# EAGLE board TPS92638 - Breakout (EAGLE 7.7.0)
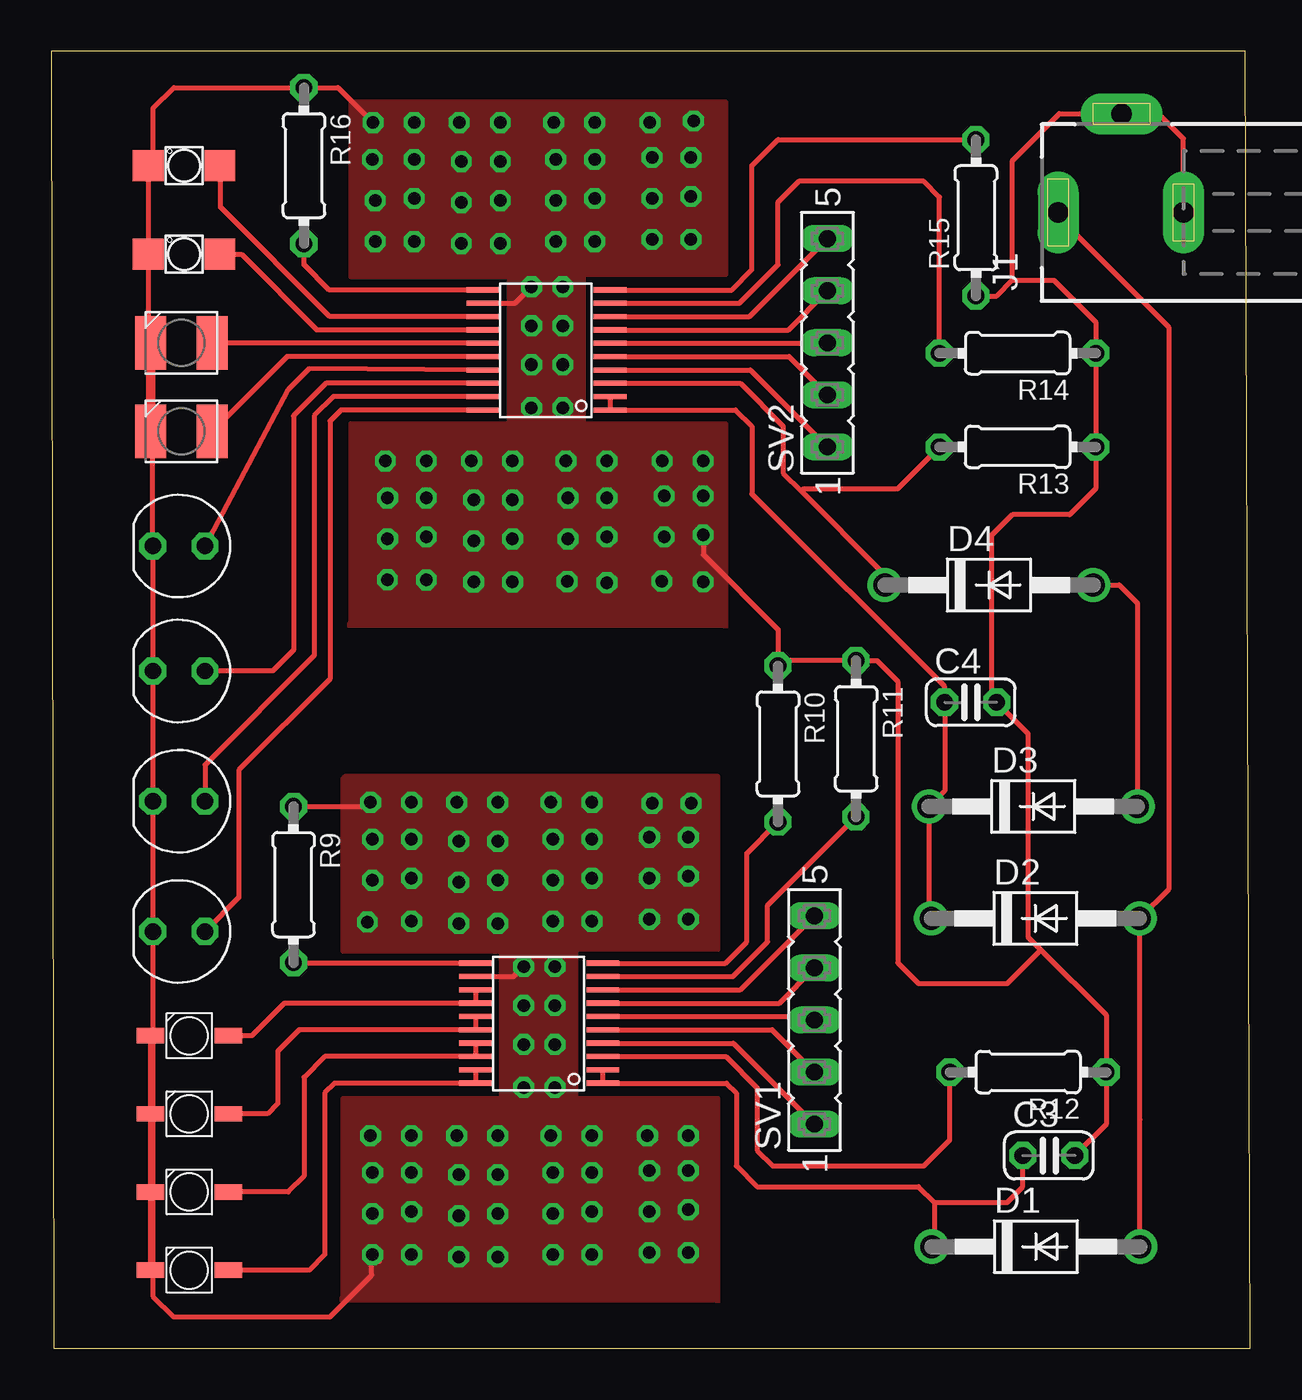
[diagram p0: board, top side]
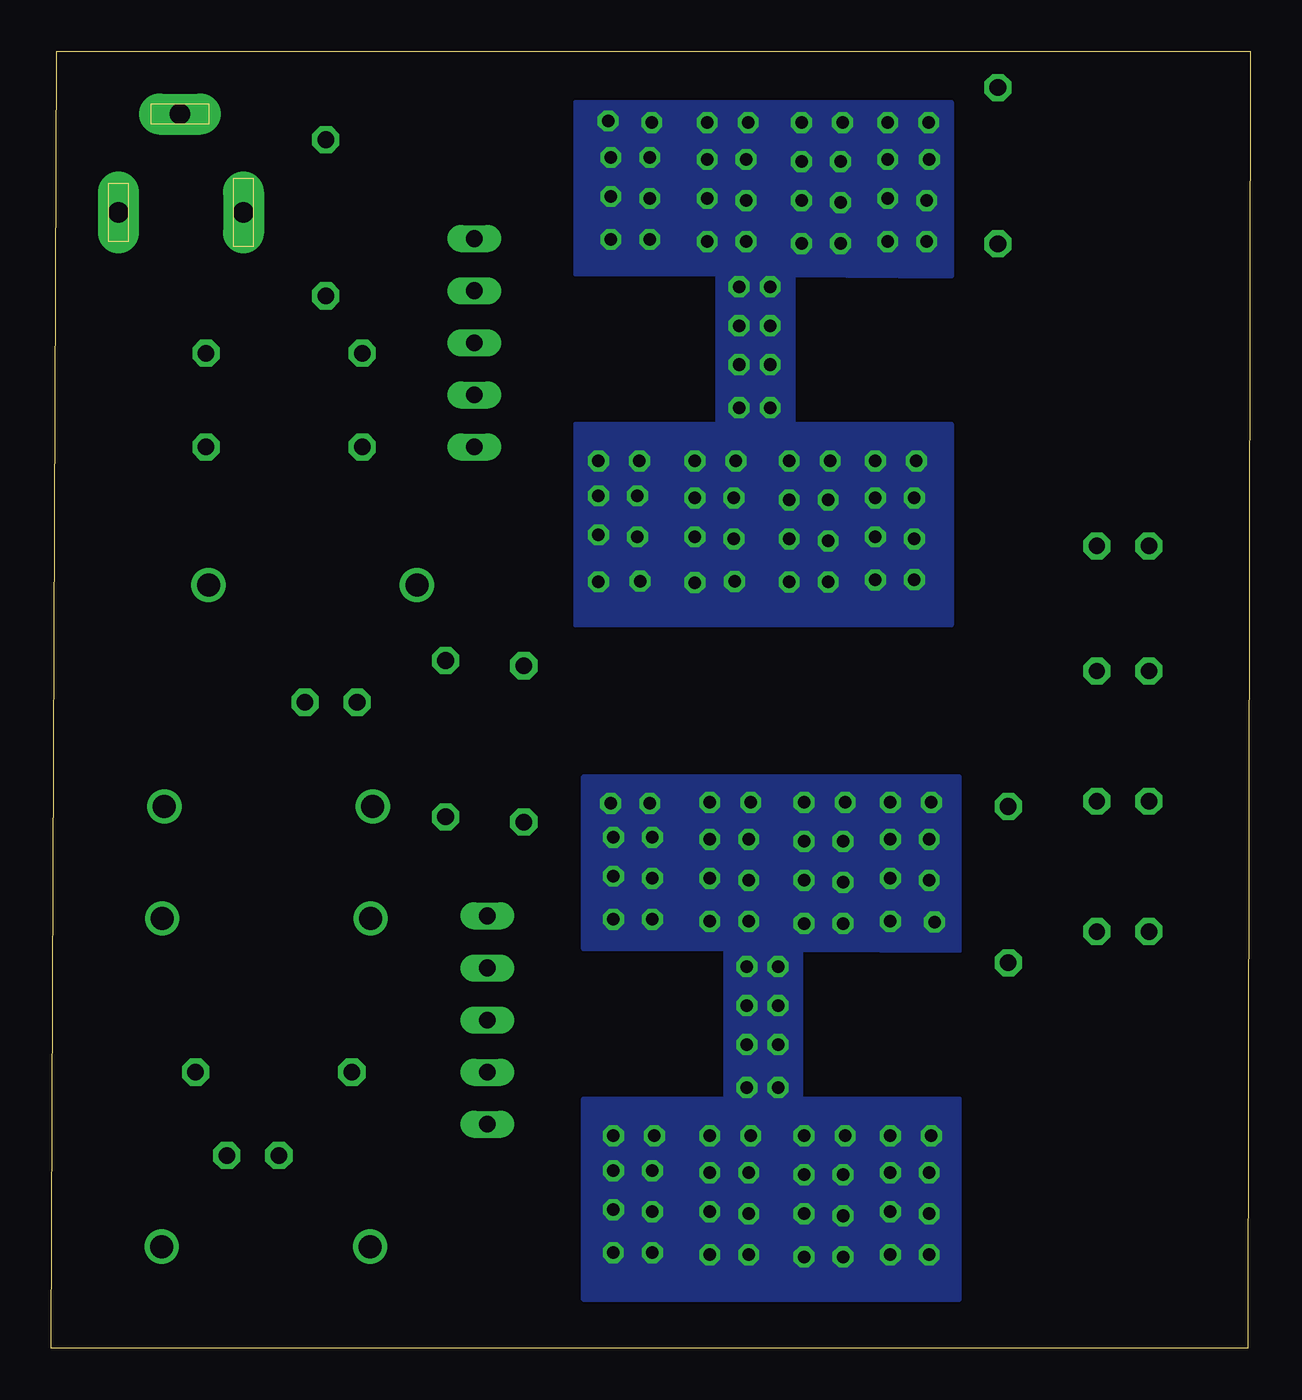
[diagram p1: board, bottom side, seen from below]

Size 58.47 x 63.24 mm. Coordinates in mm from the lower left corner, seen from the top.
Outline: 0.13,0 58.47,0 58.22,63.24 0,63.24 0.13,0
Copper layers (1*16): Top 0.035mm / dielectric 1.5mm / Bottom 0.035mm
Design rules "default": minimum track width 10mil, minimum drill 24mil, track to track 8mil, track to pad 8mil, pad to pad 8mil, via to via 8mil, smd to smd 8mil, copper to edge 40mil, drill to drill 8mil, minimum pad ring 10mil, minimum via ring 8mil, stop-mask expansion 4mil, vias tented up to drill 0mil, thermal gap 10mil

## Footprints (pad centres in the part's own frame; a part is rotated, then mirrored left to right if it is on the bottom)
GULLWING-2.3MM = smd 1.35 x 0.75: P$1 -1.9,0; P$2 1.9,0
C025-024X044 = drill 0.813 octagon: 1 -1.27,0; 2 1.27,0
DO41-10 = drill 1.118: A 5.08,0; C -5.08,0
DCJ0202 = drill 1 pad 2 long: 1 0,3.1; 2 4.8,0; 3 0,-3
0204/7 = drill 0.813 octagon: 1 -3.81,0; 2 3.81,0
FE05-1 = drill 0.813 long: 1 -5.08,0; 2 -2.54,0; 3 0,0; 4 2.54,0; 5 5.08,0
TPS92638 = smd 0.25 x 1.6: EN -2.25,-3.1; GND 2.3,3.1; IOUT1 -2.9,3.1; IOUT2 -2.25,3.1; IOUT3 -1.6,3.1; IOUT4 -0.95,3.1; IOUT5 -0.3,3.1; IOUT6 0.35,3.1; IOUT7 1,3.1; IOUT8 1.65,3.1; PWM1 -0.95,-3.1; PWM2 -0.3,-3.1; PWM3 0.35,-3.1; PWM4 1,-3.1; REF 2.95,3.1; REFHI 2.95,-3.1; STOP -1.6,-3.1; SUPPLY -2.9,-3.1; TEMP 2.3,-3.1; ~FAULT 1.65,-3.1
1316 = drill 0.8 octagon: ANODE -1.27,0; CATHODE 1.27,0
L424 = drill 0.8 octagon: ANODE -1.27,0; CATHODE 1.27,0
LHT674 = smd 1.5 x 2.6: ANODE -1.5,0; CATHODE 1.5,0
OSI-330_SERIES = smd 1.5 x 1.5: ANODE -1.75,0; CATHODE 1.75,0

## Placement (x,y rotation side)
940NM1  VSMB2020  [GULLWING-2.3MM]  6.73,3.81 180 top
940NM2  VSMB2020  [GULLWING-2.3MM]  6.73,7.62 180 top
940NM3  VSMB2020  [GULLWING-2.3MM]  6.73,11.43 180 top
940NM4  VSMB2020  [GULLWING-2.3MM]  6.73,15.24 180 top
C3  0.1uF  [C025-024X044]  48.64,9.4 0 top
C4  0.1uF  [C025-024X044]  44.83,31.5 0 top
D1  1N4004  [DO41-10]  48.01,4.95 0 top
D2  1N4004  [DO41-10]  47.98,20.96 0 top
D3  1N4004  [DO41-10]  47.88,26.42 0 top
D4  1N4004  [DO41-10]  45.72,37.21 0 top
J1  DCJ0202  [DCJ0202]  52.2,55.37 90 top
R9  16k  [0204/7]  11.81,22.61 270 top
R10  7k  [0204/7]  35.43,29.46 270 top
R11  10k  [0204/7]  39.24,29.72 270 top
R12  10k  [0204/7]  47.62,13.46 180 top
R13  10k  [0204/7]  47.12,43.94 180 top
R14  10k  [0204/7]  47.12,48.51 180 top
R15  10k  [0204/7]  45.09,55.12 90 top
R16  49k  [0204/7]  12.32,57.66 270 top
SV1  [FE05-1]  37.21,16 90 top
SV2  [FE05-1]  37.85,49.02 90 top
U$1  TPS92638  [TPS92638]  23.79,15.82 90 top
U$2  TPS92638  [TPS92638]  24.14,48.65 90 top
U$3  1316  [1316]  6.22,20.32 180 top
U$4  1316  [1316]  6.22,26.67 180 top
U$5  L424  [L424]  6.22,33.02 180 top
U$6  L424  [L424]  6.22,39.12 180 top
U$7  LHT674  [LHT674]  6.35,44.7 180 top
U$8  LHT674  [LHT674]  6.35,49.02 180 top
U$9  OSI-330_SERIES  [OSI-330_SERIES]  6.48,53.34 180 top
U$10  OSI-330_SERIES  [OSI-330_SERIES]  6.48,57.66 180 top

## Library data of the parts
940NM1-940NM4 = VS
C3 C4 R9-R16 = rcl
D1-D4 = diode
J1 = con-jack; OC_FARNELL: unknown; OC_NEWARK: unknown
SV1 SV2 = con-lsta; OC_FARNELL: unknown; OC_NEWARK: unknown
U$1 U$2 = TPS92638-Q1
U$3 U$4 = 1316
U$5 U$6 = L424
U$7 U$8 = LHT674
U$9 U$10 = OSI-330_series

## Nets
+12V: D1.A D2.A J1.1
GND: 940NM1.P$2 940NM2.P$2 940NM3.P$2 940NM4.P$2 C3.2 C4.2 J1.2 J1.3 R9.1 R10.1 R11.1 R12.1 R13.1 R14.1 R15.1 R16.1 U$1.GND U$2.GND U$3.CATHODE U$4.CATHODE U$5.CATHODE U$6.CATHODE U$7.CATHODE U$8.CATHODE U$9.CATHODE U$10.CATHODE
N$1: SV1.1 U$1.PWM1
N$2: SV1.2 U$1.PWM2
N$3: SV1.3 U$1.PWM3
N$4: SV1.4 U$1.PWM4
N$5: R12.2 U$1.STOP
N$6: SV2.1 U$2.PWM1
N$7: SV2.2 U$2.PWM2
N$8: SV2.3 U$2.PWM3
N$9: SV2.4 U$2.PWM4
N$10: D4.C R13.2 U$2.STOP
N$11: R10.2 U$1.REFHI
N$12: R11.2 U$1.TEMP
N$13: R9.2 U$1.REF
N$14: R14.2 U$2.TEMP
N$15: R15.2 U$2.REFHI
N$16: R16.2 U$2.REF
N$17: C3.1 D1.C U$1.EN U$1.SUPPLY
N$18: C4.1 D2.C D3.C U$2.EN U$2.SUPPLY
N$19: 940NM1.P$1 U$1.IOUT1 U$1.IOUT2
N$20: 940NM2.P$1 U$1.IOUT3 U$1.IOUT4
N$21: U$2.IOUT1 U$3.ANODE
N$22: 940NM3.P$1 U$1.IOUT5 U$1.IOUT6
N$23: 940NM4.P$1 U$1.IOUT7 U$1.IOUT8
N$24: U$2.IOUT2 U$4.ANODE
N$25: U$2.IOUT3 U$5.ANODE
N$26: U$2.IOUT4 U$6.ANODE
N$27: U$2.IOUT5 U$7.ANODE
N$28: U$2.IOUT6 U$8.ANODE
N$29: U$2.IOUT7 U$9.ANODE
N$30: U$2.IOUT8 U$10.ANODE
N$32: SV1.5 U$1.~FAULT
N$33: SV2.5 U$2.~FAULT
N$34: D3.A D4.A

## Tracks (layer width: path | path; a pad name or v marks a point on that pad's centre or on a via)
+12V
  Top 0.254: 53.06,11.18 D2.A 54.48,22.38 54.48,49.78 49.1,55.17 J1.1 | 53.06,11.18 53.06,10.14 | D1.A 53.09,11.15 53.06,11.18
GND  (via drill 0.61 pad 0.25)
  Top 0.254: 4.95,48.26 4.95,44.81 | 4.95,44.81 U$7.CATHODE 4.73,44.83 U$9.CATHODE U$10.CATHODE 4.95,57.88 4.95,60.45 5.97,61.47 R16.1 13.98,61.47 v15.69,59.76 | U$4.CATHODE U$5.CATHODE U$6.CATHODE 4.95,44.81 | 4.95,3.93 940NM1.P$2 940NM2.P$2 940NM3.P$2 940NM4.P$2 | U$4.CATHODE U$3.CATHODE 4.95,15.36 | 16,4.22 v15.66,4.56 15.62,4.51 15.62,3.56 13.59,1.52 5.97,1.52 4.95,2.54 U$4.CATHODE | U$2.GND 22.61,50.95 v23.41,51.76 | U$1.GND 22.55,18.12 v23.03,18.61 | R9.1 15.37,26.42 v15.56,26.61 | v31.79,39.66 31.79,38.69 35.43,35.05 R10.1 35.69,33.53 R11.1 40.26,33.53 41.28,32.51 41.28,18.8 42.29,17.78 46.61,17.78 48.26,19.43 | 48.26,19.43 51.44,16.26 R12.1 51.44,10.92 C3.2 | 48.26,19.43 47.62,20.07 47.62,29.97 C4.2 45.85,31.75 45.85,39.62 46.86,40.64 49.66,40.64 50.93,41.91 R13.1 R14.1 50.93,50.04 48.9,52.07 46.86,52.07 | J1.3 55.2,58.98 53.98,60.2 52.22,60.2 J1.2 52.17,60.2 49.15,60.2 46.86,57.91 46.86,52.07 | R15.1 46.1,51.31 46.86,52.07
  Top 0.381: 4.73,48.49 4.95,48.26 4.95,48.92 U$8.CATHODE | 4.95,15.36 940NM4.P$2 | 15.51,59.94 v15.69,59.76 | U$7.CATHODE 4.85,44.6 4.44,44.2 4.44,44.3 U$7.CATHODE
  other vias: 19.89,59.76 21.89,59.76 24.49,59.76 26.49,59.76 17.69,59.76 29.19,59.76 17.69,57.96 19.99,57.86 21.89,57.86 24.59,57.96 26.49,57.96 29.29,58.06 31.19,58.06 15.79,55.96 17.69,56.06 19.99,55.86 21.89,55.96 24.59,55.96 26.49,56.06 29.29,56.06 31.19,56.16 15.79,53.96 17.69,53.96 19.99,53.86 21.89,53.86 24.59,53.96 26.49,53.96 29.29,54.06 31.19,54.06 18.29,43.26 16.29,43.26 20.49,43.26 22.49,43.26 25.09,43.26 27.09,43.26 29.79,43.26 31.79,43.26 31.79,41.56 29.89,41.56 27.09,41.46 25.19,41.46 22.49,41.36 20.59,41.36 18.29,41.46 16.39,41.46 16.39,39.46 18.29,39.56 20.59,39.36 22.49,39.46 25.19,39.46 27.09,39.56 29.89,39.56 16.39,37.47 18.29,37.46 20.59,37.36 22.49,37.36 25.15,37.38 27.09,37.33 23.41,49.86 23.41,47.96 23.41,45.86 24.94,51.76 24.94,49.86 24.94,47.96 24.94,45.86 24.56,18.61 24.56,16.71 24.56,14.81 24.56,12.71 23.03,16.71 23.03,14.81 23.03,12.71 19.76,26.61 21.76,26.61 24.36,26.61 26.36,26.61 17.56,26.61 15.66,24.81 17.56,24.81 19.86,24.71 21.76,24.71 24.46,24.81 26.36,24.81 29.16,24.91 31.06,24.91 15.66,22.81 17.56,22.91 19.86,22.71 21.76,22.81 24.46,22.81 26.36,22.91 29.16,22.91 31.06,23.01 17.56,20.81 19.86,20.71 21.76,20.71 24.46,20.81 26.36,20.81 29.16,20.91 31.06,20.91 15.56,10.36 19.76,10.36 21.76,10.36 24.36,10.36 26.36,10.36 17.56,10.36 29.06,10.36 31.06,10.36 15.66,8.56 17.56,8.56 19.86,8.46 21.76,8.46 24.46,8.56 26.36,8.56 29.16,8.66 31.06,8.66 15.66,6.56 17.56,6.66 19.86,6.46 21.76,6.56 24.46,6.56 26.36,6.66 29.16,6.66 31.06,6.76 17.56,4.56 19.86,4.46 21.76,4.46 24.46,4.56 26.36,4.56 29.16,4.66 15.66,57.96 29.29,26.56 31.2,26.56 15.41,20.78 31.07,4.66 31.32,59.84 29.76,37.4 31.79,37.37
  pour Top: 22.32,52.26 22.32,45.06 14.59,45.06 14.59,35.36 14.49,35.26 32.79,35.26 32.89,35.16 32.89,45.06 25.96,45.06 25.96,52.36 32.89,52.36 32.89,60.76 14.69,60.76 14.59,60.66 14.59,52.26
  pour Bottom: 22.32,52.31 22.32,45.06 14.59,45.06 14.59,35.26 32.89,35.26 32.89,45.06 25.96,45.06 25.96,52.36 32.89,52.36 32.89,60.76 14.59,60.76 14.59,52.26
  pour Top: 21.94,19.37 21.94,12.17 14.21,12.17 14.21,2.47 14.11,2.37 32.41,2.37 32.51,2.27 32.51,12.17 25.58,12.17 25.58,19.47 32.51,19.47 32.51,27.87 14.31,27.87 14.21,27.77 14.21,19.37
  pour Bottom: 21.94,19.42 21.94,12.17 14.21,12.17 14.21,2.37 32.51,2.37 32.51,12.17 25.58,12.17 25.58,19.47 32.51,19.47 32.51,27.87 14.21,27.87 14.21,19.37
N$1
  Top 0.254: U$1.PWM1 33.26,14.87 SV1.1
N$2
  Top 0.254: U$1.PWM2 35.15,15.52 SV1.2
N$3
  Top 0.254: U$1.PWM3 37.04,16.17 SV1.3
N$4
  Top 0.254: U$1.PWM4 35.49,16.82 SV1.4
N$5
  Top 0.254: U$1.STOP 32.89,14.22 34.42,12.7 34.42,9.65 35.18,8.89 42.55,8.89 43.82,10.16 R12.2
N$6
  Top 0.254: U$2.PWM1 34.09,47.7 SV2.1
N$7
  Top 0.254: U$2.PWM2 35.98,48.35 SV2.2
N$8
  Top 0.254: U$2.PWM3 37.82,49 SV2.3
N$9
  Top 0.254: U$2.PWM4 35.93,49.65 SV2.4
N$10
  Top 0.254: U$2.STOP 33.6,47.05 35.69,44.96 35.69,42.67 36.58,41.78 | 36.58,41.78 40.51,37.85 40.51,37.34 D4.C | 36.58,41.78 36.7,41.91 41.28,41.91 R13.2
N$11
  Top 0.254: U$1.REFHI 32.87,18.77 33.91,19.81 33.91,24.13 R10.2
N$12
  Top 0.254: U$1.TEMP 33.24,18.12 34.93,19.81 34.93,21.59 R11.2
N$13
  Top 0.254: U$1.REF 11.83,18.77 R9.2
N$14
  Top 0.254: U$2.TEMP 33.55,50.95 35.43,52.83 35.43,55.88 36.45,56.9 42.55,56.9 43.31,56.13 R14.2
N$15
  Top 0.254: U$2.REFHI 33.18,51.6 34.16,52.58 34.16,57.66 35.43,58.93 R15.2
N$16
  Top 0.254: U$2.REF 13.55,51.6 12.32,52.83 R16.2
N$17
  Top 0.254: U$1.EN U$1.SUPPLY 32.92,12.92 33.4,12.45 33.4,8.89 34.42,7.87 42.29,7.87 43.05,7.11 | 43.05,7.11 43.05,5.08 D1.C | 43.05,7.11 46.61,7.11 47.37,7.87 C3.1
N$18
  Top 0.254: U$2.EN U$2.SUPPLY 33.37,45.75 34.16,44.96 34.16,41.66 43.56,32.26 C4.1 43.56,27.18 D3.C 42.8,21.06 D2.C
N$19
  Top 0.254: U$1.IOUT2 U$1.IOUT1 13.81,12.92 13.34,12.45 13.34,4.57 12.57,3.81 940NM1.P$1 8.51,3.93
N$20
  Top 0.254: 8.51,7.74 940NM2.P$1 11.56,7.62 12.32,8.38 12.32,13.21 13.34,14.22 U$1.IOUT3 U$1.IOUT4
N$21
  Top 0.254: U$2.IOUT1 14.13,45.75 13.59,45.21 13.59,32.64 9.14,28.19 9.14,21.97 U$3.ANODE
N$22
  Top 0.254: 8.76,11.56 940NM3.P$1 10.54,11.43 11.05,11.94 11.05,14.48 12.1,15.52 U$1.IOUT5 U$1.IOUT6 20.64,16.13
N$23
  Top 0.254: 8.88,14.99 940NM4.P$1 9.78,15.24 11.36,16.82 U$1.IOUT7 U$1.IOUT8
N$24
  Top 0.254: U$2.IOUT2 13.76,46.4 12.83,45.47 12.83,33.78 7.49,28.45 U$4.ANODE
N$25
  Top 0.254: U$2.IOUT3 13.39,47.05 11.81,45.47 11.81,34.04 10.79,33.02 U$5.ANODE
N$26
  Top 0.254: U$2.IOUT4 12.57,47.75 11.56,46.74 U$6.ANODE
N$27
  Top 0.254: U$2.IOUT5 11.5,48.35 U$7.ANODE
N$28
  Top 0.254: U$2.IOUT6 7.87,49 U$8.ANODE
N$29
  Top 0.254: U$9.ANODE 9.27,53.34 12.96,49.65 U$2.IOUT7
N$30
  Top 0.254: U$2.IOUT8 13.58,50.3 8.26,55.63 8.26,57.63 U$10.ANODE
N$32
  Top 0.254: U$1.~FAULT 33.6,17.47 SV1.5
N$33
  Top 0.254: U$2.~FAULT 34.04,50.3 SV2.5
N$34
  Top 0.254: D4.A 52.07,37.21 52.96,36.32 D3.A